# Altium PCB PCB_LCD.PcbDoc
Units mil, origin at the board's own origin, x right, y up, seen from the top; angles counter-clockwise.
Board outline 2327.75 x 3205.03 mil, 2 copper layers (Top Layer, Bottom Layer); 11 components, 24 nets, 62 pads, 9 vias.
Unrouted connection lines stored in the file: 2.
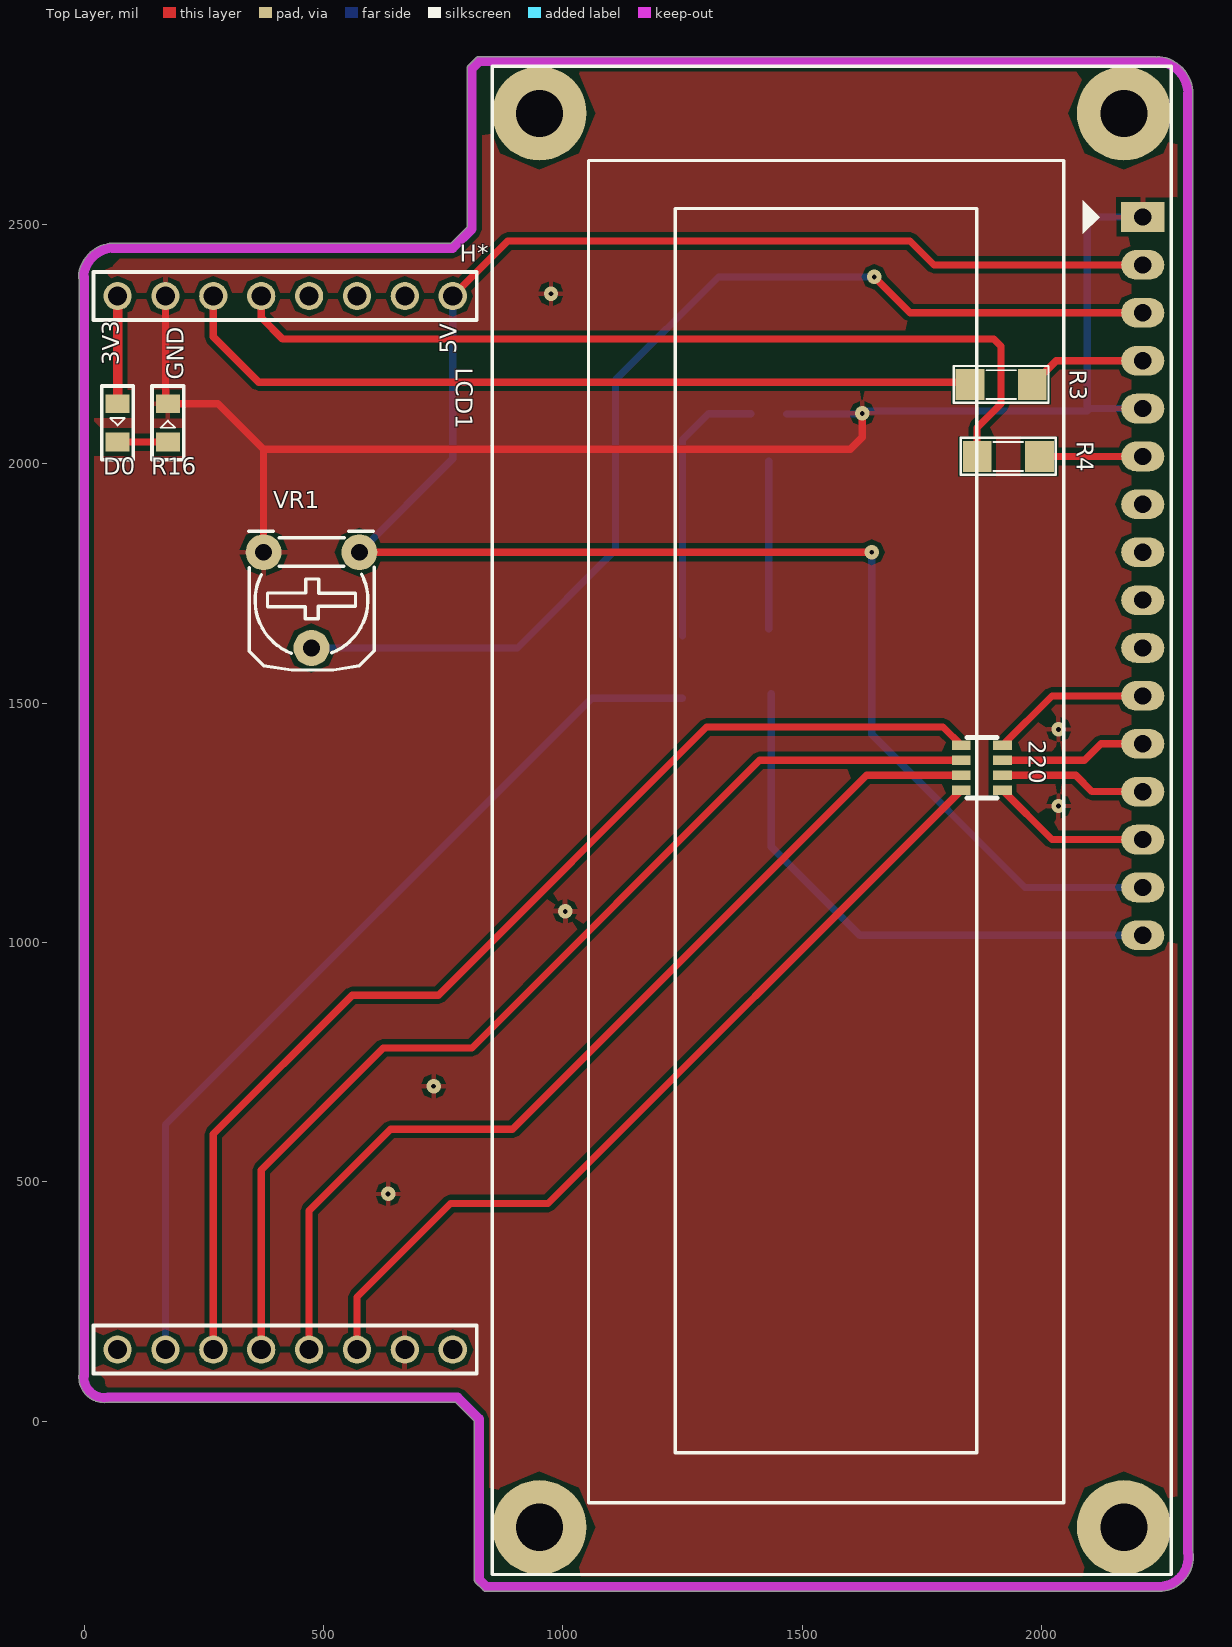
[diagram p0: Top Layer view]
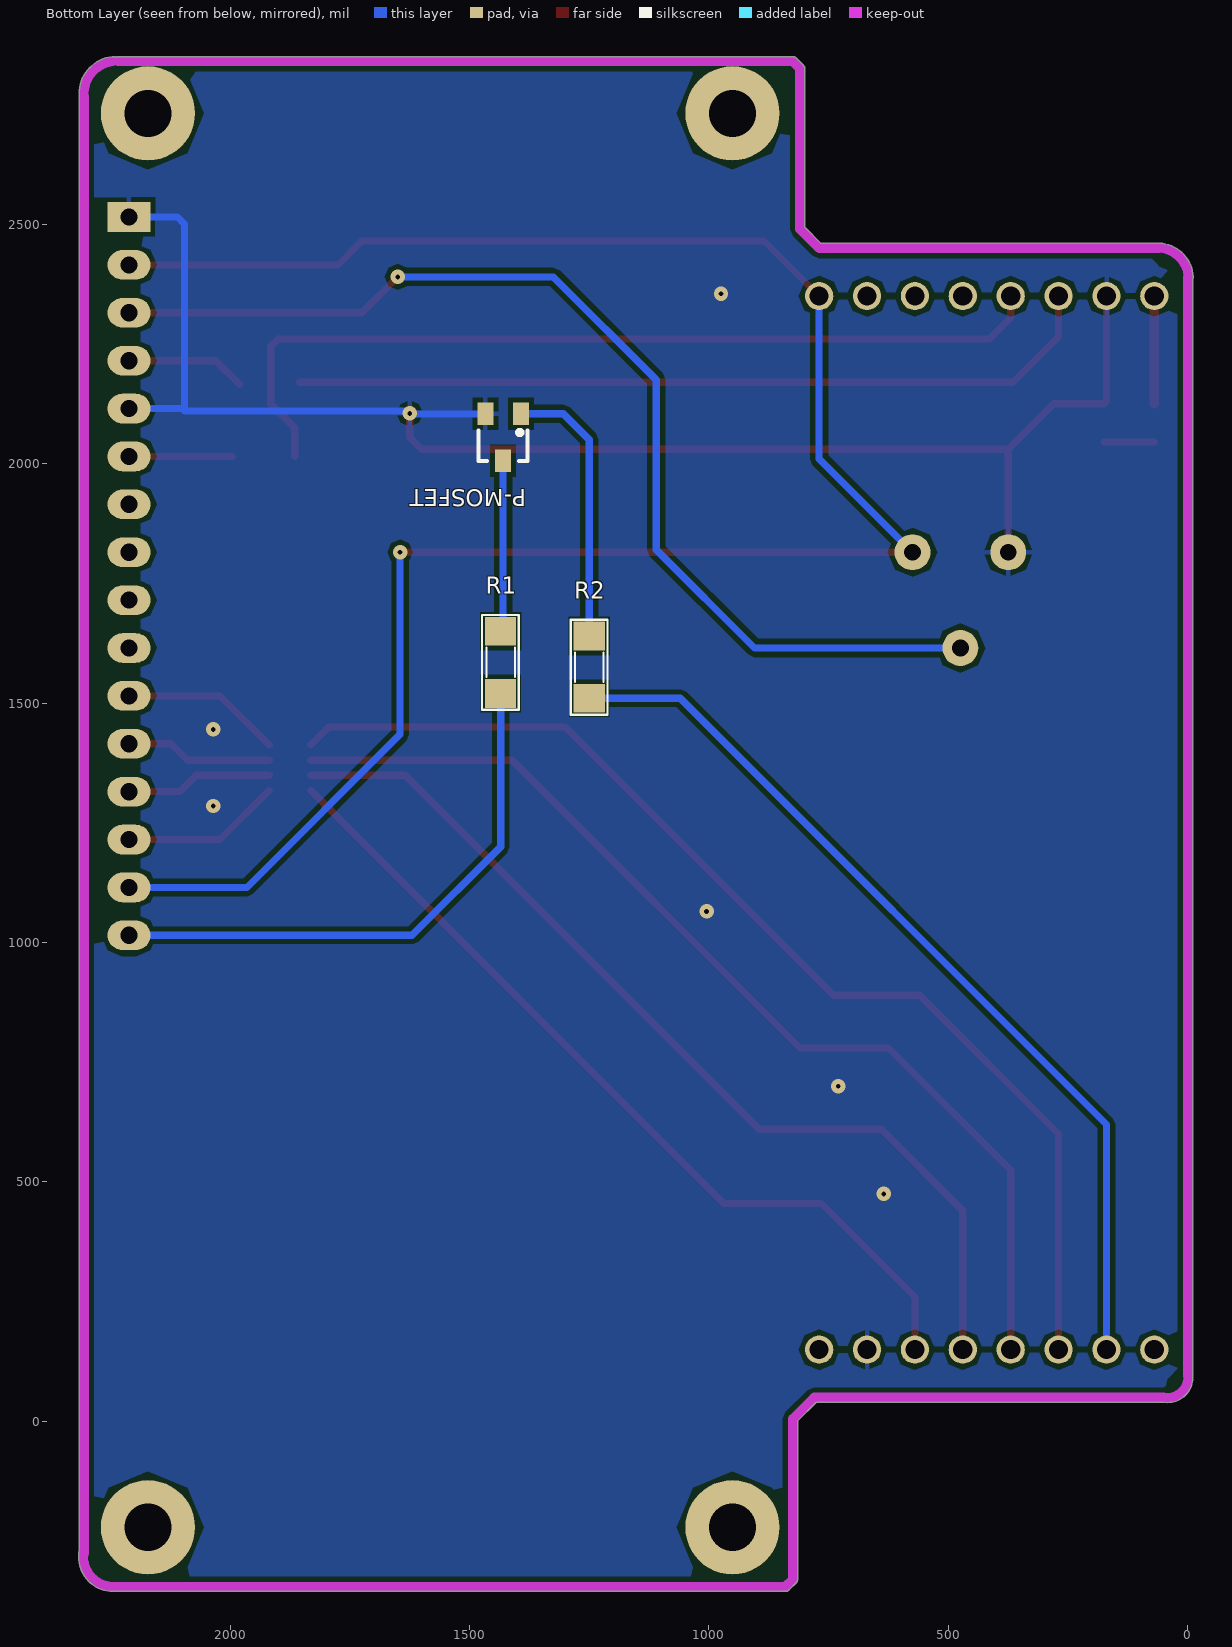
[diagram p1: Bottom Layer view, seen from below]
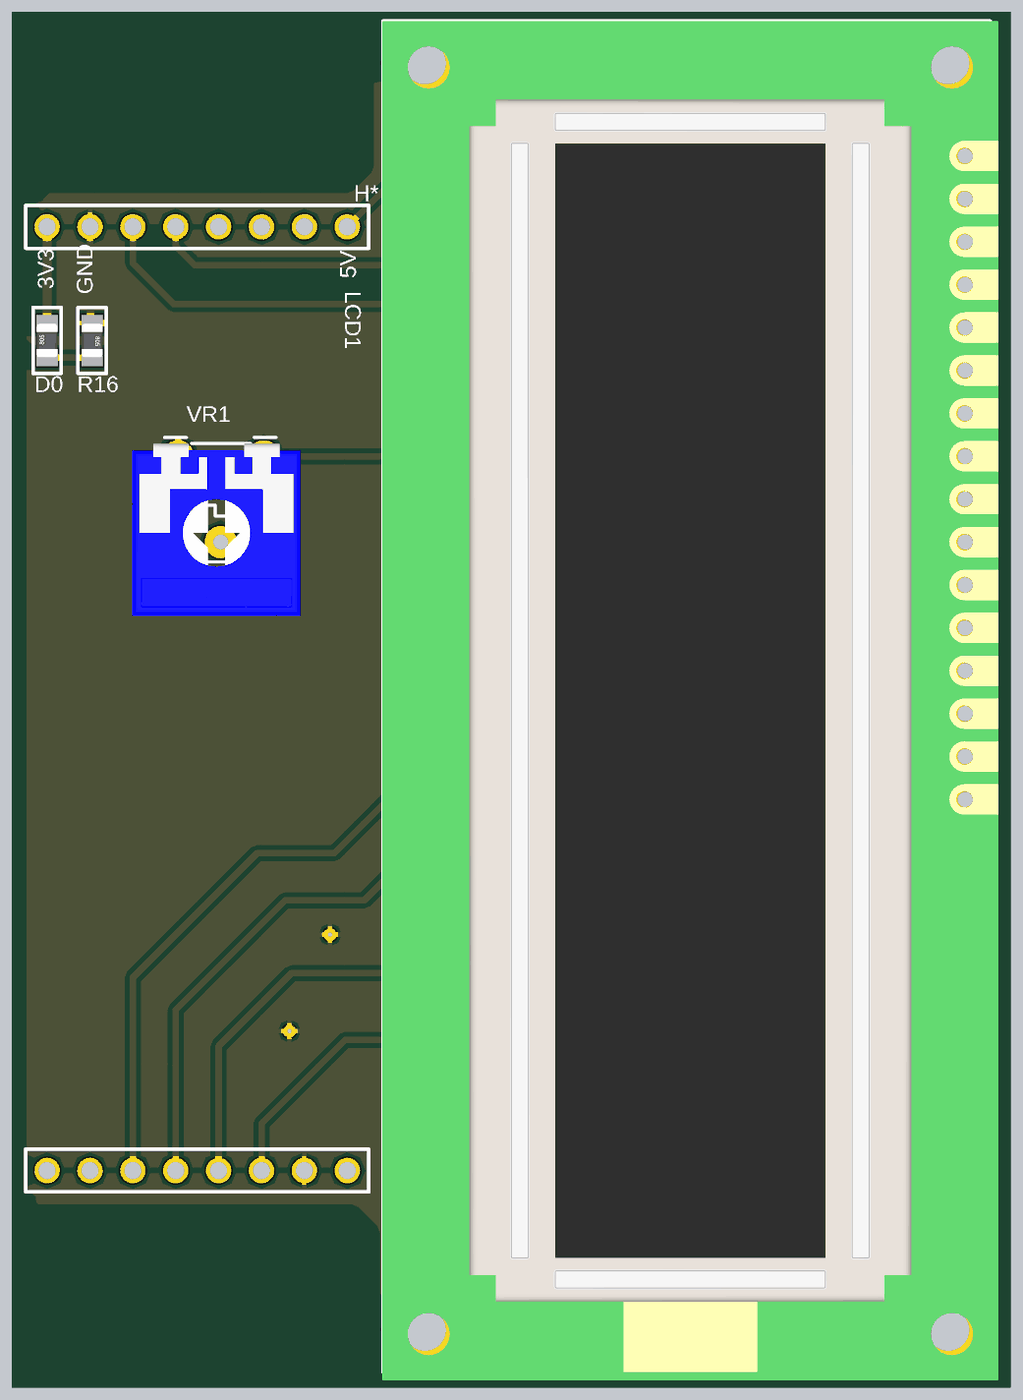
[diagram p2: 3D render of the assembled board from above, using the file's embedded part models]
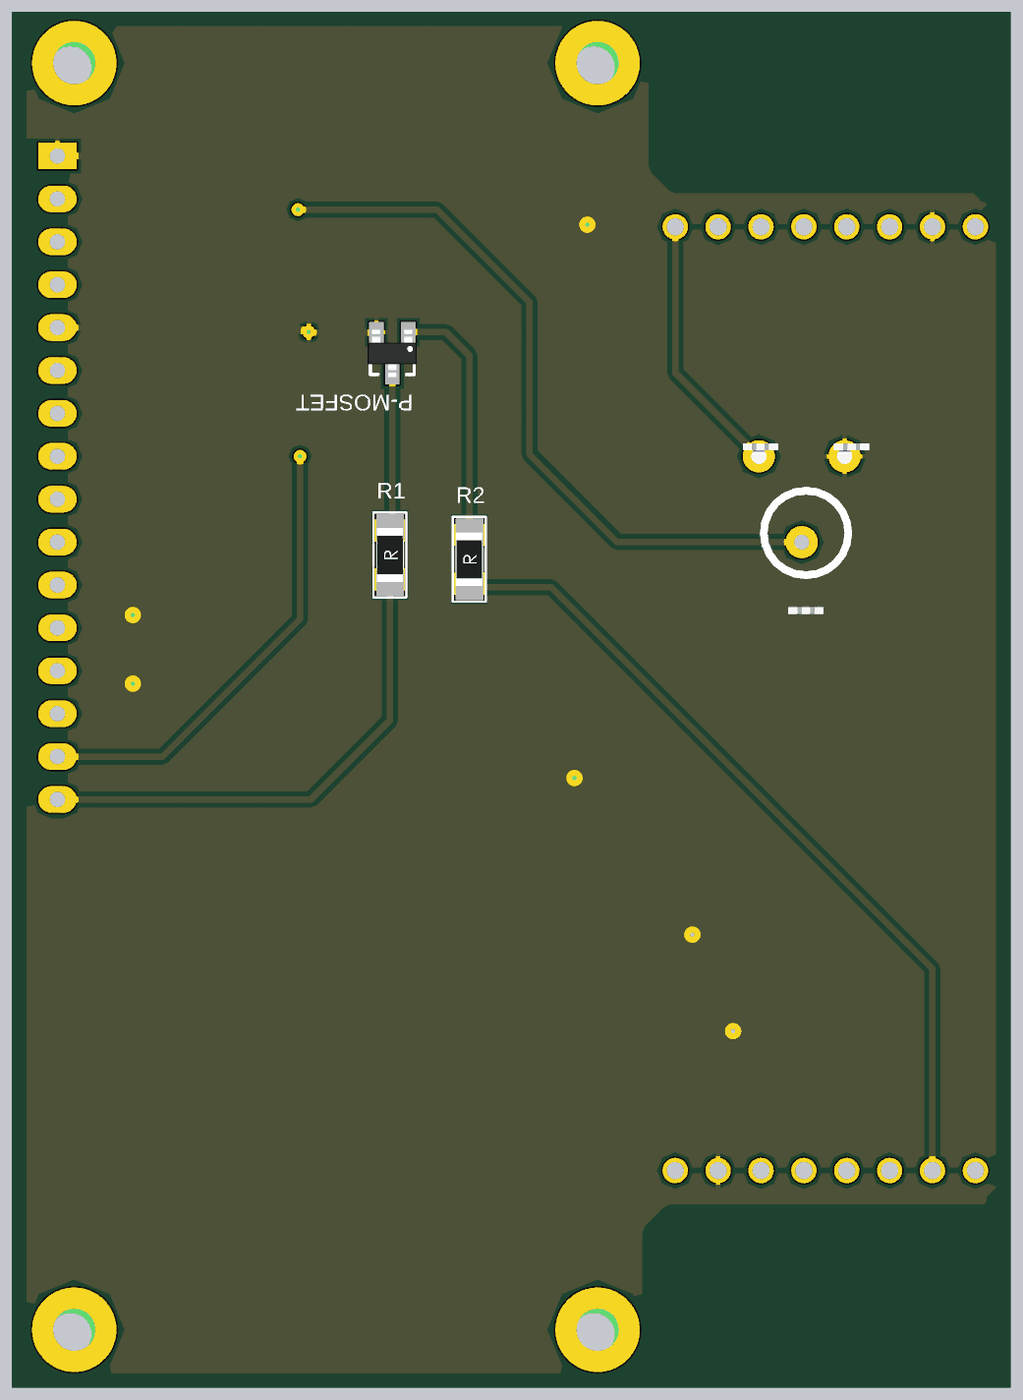
[diagram p3: 3D render of the assembled board from below, using the file's embedded part models]

## Layer stack, top to bottom
Top Layer: signal copper 1.4
Dielectric: dielectric 12.6, FR-4, Dk 4.8
Bottom Layer: signal copper 1.4

## Board outline
-10.58,95.19 cw(c-0.58,94.65) -10.02,98.02 -10.02,2385.05 cw(c-1.35,2390.08) -11.35,2390.67 cw(c62.69,2386.31) 58.98,2460.38 cw(c59.48,2450.38) 62.22,2460.02 765.85,2460.02 799.98,2494.15 799.98,2825 cw(c810,2825) 802.92,2832.08 817.92,2847.08 cw(c825,2840) 825,2850.02 2235,2850.02 cw(c2235,2840) 2240,2848.68 cw(c2245,2840) 2246.11,2849.95 cw(c2237.5,2772.5) 2315.43,2772.5 cw(c2237.5,2772.5) 2315.02,2764.46 2315.02,-268.98 cw(c2244.4,-283.02) 2316.4,-283.02 cw(c2244.4,-283.02) 2245.1,-355.01 cw(c2245,-345) 2244.7,-355.01 cw(c2244.4,-345) 2244.4,-355.02 840,-355.02 cw(c840,-345) 832.92,-352.08 817.92,-337.08 cw(c825,-330) 814.98,-330 814.98,0.85 775.85,39.98 50.85,39.98 cw(c42.39,92.35)

## Design rules (kind name [scope] priority, off if disabled: settings)
Clearance [All] p1: gap=10
PolygonConnect [All] p1: connectstyle=Relief reliefconductorwidth=10 reliefentries=4 polygonreliefangle="90 Angle"
RoutingVias [All] p1: holewidth=28 width=50 viastyle="Through Hole" minholewidth=28 minwidth=50 maxholewidth=28 maxwidth=50
SilkscreenOverComponentPads [All] p1: minsilkscreentomaskgap=10
SolderMaskExpansion [All] p1: expansion=4
Width [All] p1: maxlimit=30 minlimit=15 preferedwidth=20 checkconnectedcopper=TRUE
27 further rules are at their usual default settings.

## Components (designator, comment, footprint, x,y, rotation, side; value= is the part's Value field where it differs from the comment)
220 "RA4" RA4 1875,1365 r270 top
D0 "Power" SMD0805 70,2085 r270 top
H* "MBoard1_BH_DualPorts" MBoard1_BH_DualPorts 70,2350 r0 top
LCD1 "LCD 16x2A" LCD16X2 2270,2830 r270 top
P-MOSFET "P-MOSFET" SOT23 1430,2055 r0 bottom
R1 "100" SM-1206 1435,1585 r90 bottom
R2 "4k7" SM-1206 1250,1575 r90 bottom
R3 "220" SM-1206 1915,2165 r0 top
R4 "220" SM-1206 1930,2015 r0 top
R16 "R" SMD0805 175,2085 r90 top
VR1 "10K" VR 575,1815 r180 top

## Footprints (in the part's own frame and the unit in brackets; to place one, negate y for a bottom-side part, rotate by r counter-clockwise, add the part's x,y. Pads: shape width x height; smd on the part's side, far side on the other; paste and mask are expansions set on the pad)
LCD16X2 [mm] "LCD dipslay 16x2, 16 pin"
  rect 1.575x2.286 hole 0.914: 1(8,-1.5)
  oval 1.575x2.286 hole 0.914: 2(10.54,-1.5) 3(13.08,-1.5) 4(15.62,-1.5) 5(18.16,-1.5) 6(20.7,-1.5) 7(23.24,-1.5) 8(25.78,-1.5) 9(28.32,-1.5) 10(30.86,-1.5) 11(33.4,-1.5) 12(35.94,-1.5) 13(38.48,-1.5) 14(41.02,-1.5) 15(43.56,-1.5) 16(46.1,-1.5)
  round 5 hole 2.5: "Hole 0"(2.5,-2.5) "Hole 0"(77.5,-2.5) "Hole 1"(2.5,-33.5) "Hole 1"(77.5,-33.5)
  silkscreen extent 0,-36 80,0, body extent 0,-36.03 80.5,0.47, height 20.52
MBoard1_BH_DualPorts [mm]
  round 1.5 hole 1.02: 1(0,0) 2(2.54,0) 3(5.08,0) 4(7.62,0) 5(10.16,0) 6(12.7,0) 7(15.24,0) 8(17.78,0) 9(17.78,-55.88) 10(15.24,-55.88) 11(12.7,-55.88) 12(10.16,-55.88) 13(7.62,-55.88) 14(5.08,-55.88) 15(2.54,-55.88) 16(0,-55.88)
  silkscreen extent -1.27,-57.15 19.05,1.27, body extent -1.27,-57.15 19.05,1.27, height 8
RA4 [mm] "Resistor Array (0603x4) form TME"
  rect 0.5x1 smd: 1(-1.2,-1.1) 2(-1.2,1.1) 3(-0.4,-1.1) 4(-0.4,1.1) 5(0.4,-1.1) 6(0.4,1.1) 7(1.2,-1.1) 8(1.2,1.1)
  silkscreen extent -1.6,-0.8 1.6,0.8, body extent -1.6,-0.8 1.6,0.8, height 0.5
SM-1206 [mil] "Compoment SMD 120x60mil"
  rect 60x65 smd: 1(-65,0) 2(65,0)
  silkscreen extent -99,-38 99,39, body extent -83,-35 83,36, height 25
SMD0805 [mil] "Chip Resistor; Body 2.0 x 1.3 mm (LxW typ)"
  rect 39.37x50 smd: 1(-40,0) 2(40,0)
  silkscreen extent -77,-33 77,33, body extent -39,-25 39,25, height 31
SOT23 [mm]
  rect 0.85x1.2 smd: 1(-0.95,-1.25) 2(0.94,-1.245) 3(0,1.25)
  silkscreen extent -1.3,-0.38 1.3,1.25, body extent -1.45,-1.4 1.45,1.4, height 1.3
VR [mil] "Resistor Variable"
  round 75 hole 35: 1(0,0) 2(100,200) 3(200,0)
  silkscreen extent -31,-44 231,246, body extent -87,-30 307,372, height 165

## Part data
D0: library part LEDSMD, "LED 3mm"
LCD1: library part LCD16x2A, "LCD dipslay 16 char, 2 line"
R1 R2 R3 R4: library part R, "Resistor 1/4W"
R16: "RES_08"
VR1: library part VR, "Var Resistor"

## Via types
v1: diameter 30, hole 10, Top Layer to Bottom Layer, 9 vias

## Nets (pads, with @x,y where several pads share a name; then routed paths per layer and width w, separated by ;. In a path a pad name is that pad's centre, name@x,y a point inside that pad or via, vN(x,y) a via of type N, cw(c..) or ccw(c..) an arc to the next point about the centre after c; other vN are vias at no path point)
3V3: D0.1 H*.1 H*.9 | length 225
  Top Layer w20: D0.1 H*.1
5V: H*.8 H*.16 LCD1.2 LCD1.15 VR1.1 | length 4273.5
  Top Layer w15: VR1.1 v1(1645,1815) ; H*.8 885,2465 1725,2465 1774.96,2415.04 LCD1.2
  Bottom Layer w15: VR1.1 770,2010 H*.8 ; v1(1645,1815) 1645,1435 1964.96,1115.04 LCD1.15
GND: H*.2 H*.10 LCD1.1 LCD1.5 P-MOSFET.2 R16.2 VR1.3 | length 3245.3
  Top Layer w15: H*.2 170,2130 R16.2 280,2125 375,2030 ; VR1.3 375,2030 ; v1(1625,2105) 1625,2055 1600,2030 375,2030
  Bottom Layer w15: P-MOSFET.2 1624,2104 1630,2110 2095,2110 ; LCD1.5 2095,2115.04 2095,2500 2110.04,2515.04 LCD1.1
  other v1: 635,475 730,700 1005,1065 2035,1285 2035,1445 975,2355
Net220_1: 220.1 H*.14 | length 2379.4
  Top Layer w15: H*.14 270,600 560,890 740,890 1300,1450 1793.94,1450 220.1
Net220_2: 220.2 LCD1.11 | length 335.2
  Top Layer w15: 220.2 2021.1,1515.04 LCD1.11
Net220_3: 220.3 H*.13 | length 2191.2
  Top Layer w15: H*.13 370,525 625,780 810,780 1410.75,1380.75 220.3
Net220_4: 220.4 LCD1.12 | length 306.8
  Top Layer w15: 220.4 2089.25,1380.75 2123.54,1415.04 LCD1.12
Net220_5: 220.5 H*.12 | length 2028.3
  Top Layer w15: H*.12 470,440 640,610 895,610 1634.25,1349.25 220.5
Net220_6: 220.6 LCD1.13 | length 306.8
  Top Layer w15: 220.6 2070.75,1349.25 2104.96,1315.04 LCD1.13
Net220_7: 220.7 H*.11 | length 1809.8
  Top Layer w15: H*.11 570,260 765,455 968.94,455 220.7
Net220_8: 220.8 LCD1.14 | length 335.2
  Top Layer w15: 220.8 2021.06,1215 LCD1.14 LCD1.14
NetD0_2: D0.2 R16.1 | length 105
  Top Layer w15: D0.2 R16.1
NetH*_3: H*.3 R3.1 | length 1709.4
  Top Layer w15: H*.3 270,2265 365,2170 R3.1@1855,2170
NetH*_4: H*.4 R4.1 | length 1865.6
  Top Layer w15: H*.4 370,2305 415,2260 1900,2260 1915,2245 1915,2125 1865,2075 R4.1
NetH*_5: H*.5
NetH*_6: H*.6
NetH*_7: H*.7
NetH*_15: H*.15 R2.1 | length 1918.7
  Bottom Layer w15: H*.15 170,620 1060,1510 R2.1
NetLCD1_3: LCD1.3 VR1.2 | length 2291
  Top Layer w15: v1(1650,2390) 1724.96,2315.04 LCD1.3
  Bottom Layer w15: VR1.2 905,1615 1110,1820 1110,2175 1325,2390 v1@1645,2390
NetLCD1_4: LCD1.4 R3.2 | length 251.6
  Top Layer w15: R3.2 2030,2215 LCD1.4
NetLCD1_6: LCD1.6 R4.2 | length 215.9
  Top Layer w15: R4.2 LCD1.6
NetLCD1_16: LCD1.16 R1.1 | length 1172.6
  Bottom Layer w15: R1.1 1435,1200 1619.96,1015.04 LCD1.16
NetP-MOSFET_1: P-MOSFET.1 R2.2 | length 575.1
  Bottom Layer w15: R2.2 1250,2050 1304.21,2104.21 P-MOSFET.1
NetP-MOSFET_3: P-MOSFET.3 R1.2 | length 350.8
  Bottom Layer w15: R1.2@1430,1655 P-MOSFET.3
pads on no net: "LCD1.Hole 0" "LCD1.Hole 1" LCD1.7 LCD1.8 LCD1.9 LCD1.10

## Polygon pours and split planes (outlines as drawn)
GND on Top Layer "Bottom Layer-No Net" (solid, remove dead copper, pour order 3): -1.35,2390.08 -1.35,76.35 0,75 25,50 35,50 780,50 825,5 825,-330 840,-345 2265,-345 2305,-305 2305,2795 2305,2800 2265,2840 830,2840 825,2840 810,2825 810,2490 770,2450 35,2450 0,2415
GND on Bottom Layer "Bottom Layer-No Net" (solid, remove dead copper, pour order 5): 0,80 30,50 780,50 825,5 825,-330 840,-345 2265,-345 2310,-300 2305,-295 2305,2800 2265,2840 825,2840 810,2825 810,2490 770,2450 40,2450 40,2445 0,2405

## Keep-outs
Keep-Out Layer:
  lines w20: -1.35,2390.08 cw(c62.69,2386.31) 59.48,2450.38 ; -0.58,94.65 ccw(c42.39,92.35) 50,50 780,50 825,5 825,-330 840,-345 2244.4,-345 ; 0,94.65 0,2390.08 ; 60,2450 770,2450 810,2490 810,2825 825,2840 2235,2840 ; 2245,-345 ccw(c2244.4,-283.02) 2305,-270 ; 2245,2840 cw(c2237.5,2772.5) 2305,2765 2305,-275

## Silkscreen, mask and mechanical layers (free items; w line width, h text height)
Top Overlay:
  text "5V" at 790,2230 h60 r90
  text "3V3" at 85,2205 h60 r90
  text "GND" at 220,2175 h60 r90